# Altium PCB COREV1.1_pcb5_0.PcbDoc (part 13 of 14)
Units mil, origin at the board's own origin, x right, y up, seen from the top; angles counter-clockwise.
Board outline 2860 x 2420 mil, 6 copper layers (Top Layer, GND, SIGNAL_1, SIGNAL_2, POWER, Bottom Layer); 110 components, 241 nets, 882 pads, 697 vias.
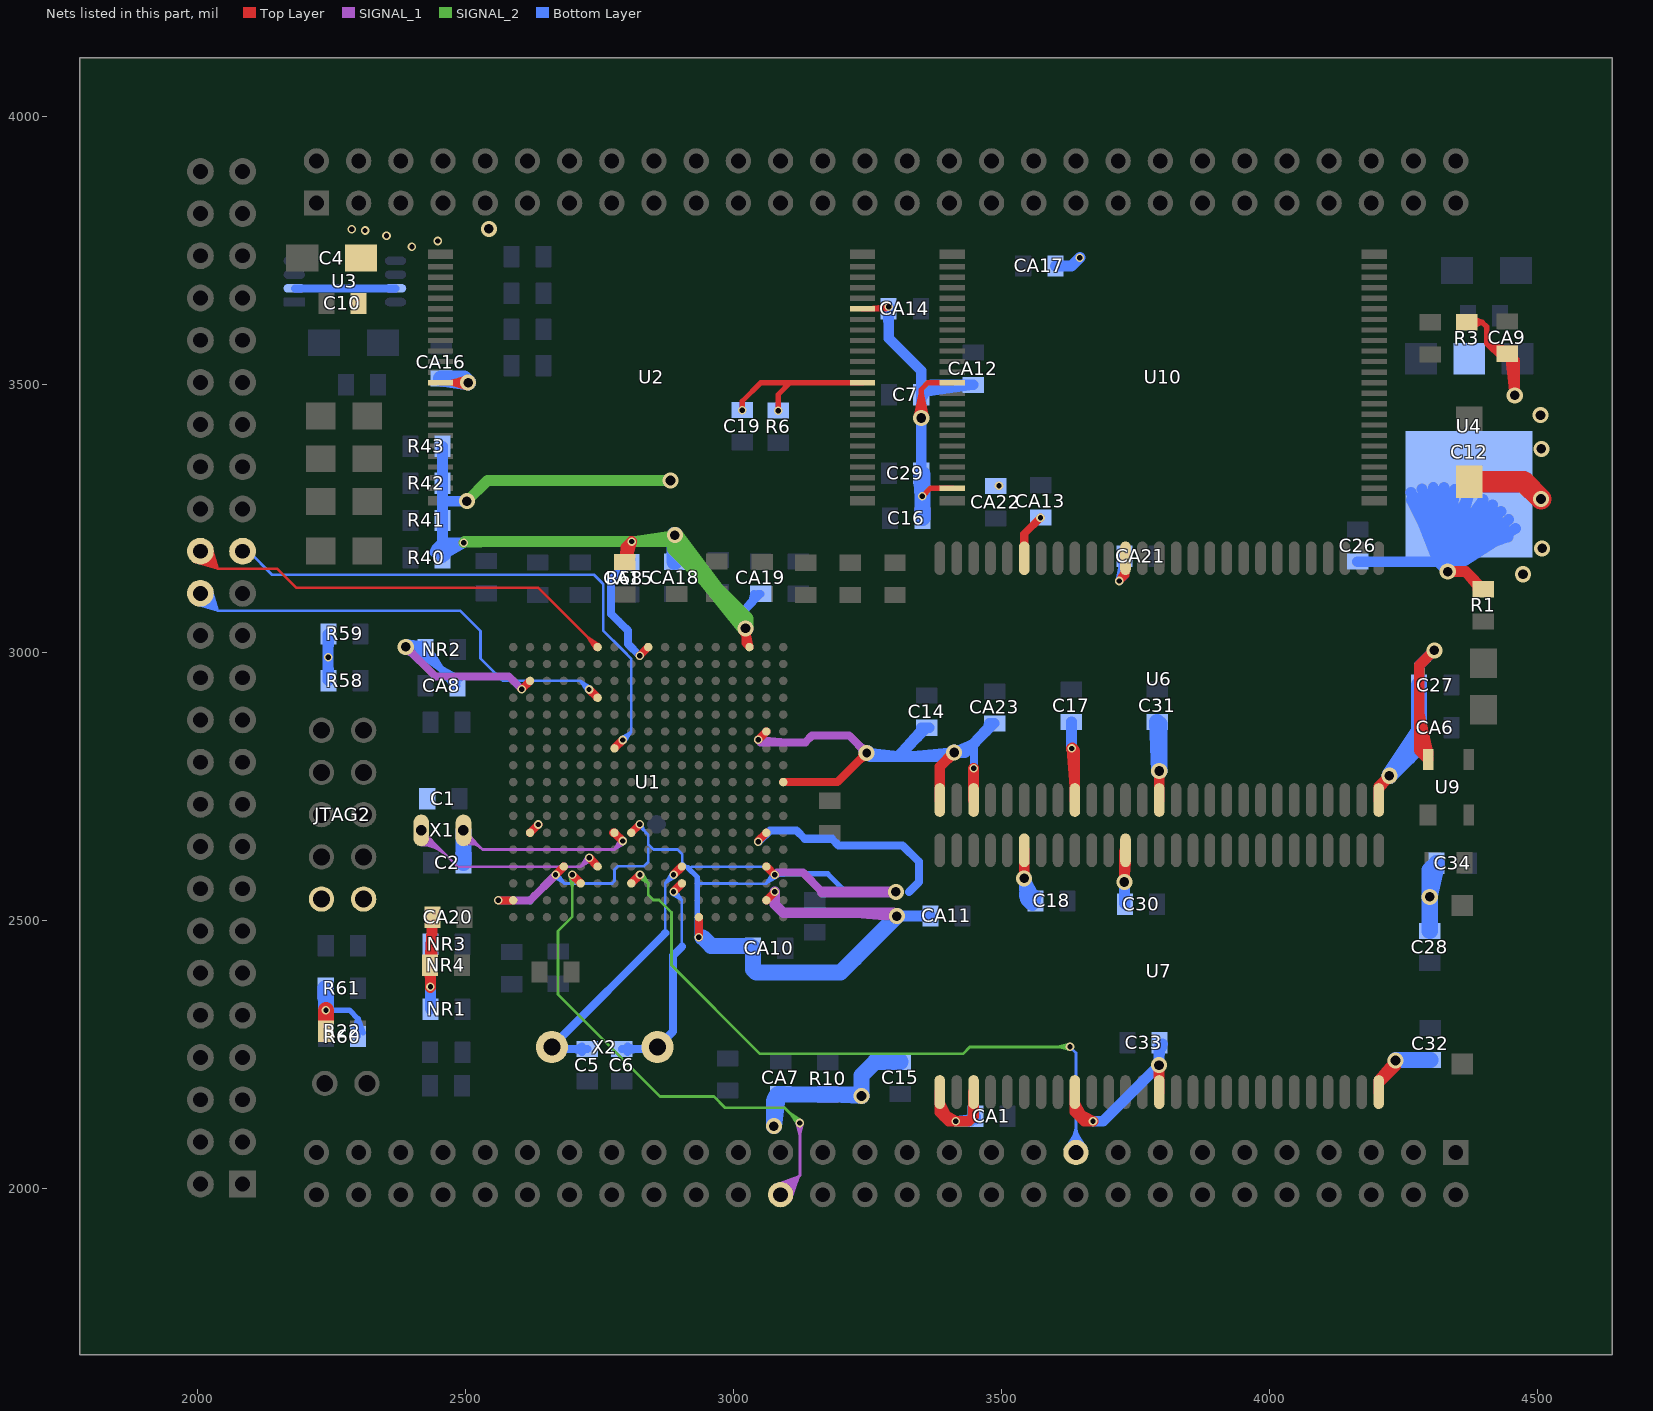
[diagram p17: the nets of this part, all layers, seen from the top]

## Via types
v1: diameter 16, hole 10, Top Layer to Bottom Layer, tented both sides, 638 vias
v2: diameter 30, hole 18, Top Layer to Bottom Layer, tented both sides, 56 vias
v3: diameter 16, hole 10, Top Layer to Bottom Layer, 2 vias
v4: diameter 30, hole 16, Top Layer to Bottom Layer, tented both sides, 1 vias

## Nets (pads, with @x,y where several pads share a name; then routed paths per layer and width w, separated by ;. In a path a pad name is that pad's centre, name@x,y a point inside that pad or via, vN(x,y) a via of type N, cw(c..) or ccw(c..) an arc to the next point about the centre after c; other vN are vias at no path point) (continued)
VDD33V: C4.1 C7.1 C10.1 C12.1 C14.1 C15.1 C16.1 C17.1 C18.1 C19.1 C26.1 C27.1 C28.1 C29.1 C30.1 C31.1 C32.1 C33.1 C34.1 CA1.1 CA6.1 CA7.1 CA8.1 CA9.1 CA10.1 CA11.1 CA12.1 CA13.1 CA14.1 CA15.1 CA16.1 CA17.1 CA18.1 CA19.1 CA20.1 CA21.1 CA22.1 CA23.1 JTAG2.1 JTAG2.2 NR1.1 NR2.1 NR3.1 NR4.1 R1.1 R3.1 R6.1 R10.1 R22.1 R40.2 R41.2 R42.2 R43.2 R58.1 R59.1 R60.1 R61.1 R68.1 U1.A9 U1.B6 U1.B12 U1.B14 U1.B16 U1.C1 U1.F17 U1.J1 U1.K12 U1.P14 U1.T3 U1.T12 U1.U16 U2.12 U2.19 U2.37 U3.2 U3.7 U4.3 U4.4 U6.1 U6.3 U6.9 U6.14 U6.27 U6.43 U6.49 U7.1 U7.3 U7.9 U7.14 U7.27 U7.43 U7.49 U9.4 U10.37 U10.47 | length 27313.2
  Top Layer w10: U2.37@2453.42,3503.52 v2(2505,3503.52) U2.37@2472.12,3503.52 ; v2@2497.93,3496.45 ccw(c2480.86,3479.38) 2480.86,3503.52 ccw(c2480.86,3527.67) v2@2497.93,3510.6 ; v2@2503.48,3493.64 U2.37@2472.12,3503.52 ; v2@2503.48,3513.41 U2.37@2472.12,3503.52 ; v1(3016.35,3452.39) 3016.35,3468.85 3051.02,3503.52 3105.52,3503.52 ; v1(3083.59,3451.5) 3083.59,3481.59 3105.52,3503.52 ; 3187.2,3503.52 U2.12@3222.13,3503.52 ; U2.12@3240.83,3503.52 3105.52,3503.52 ; U2.19@3240.83,3641.32 v1@3285.32,3641.32 ; U2.19@3250.14,3641.32 v1(3289.5,3645.5) ; 3272.16,3641.32 ccw(c3272.16,3662.84) v1@3287.38,3647.62 ; v2@3340.45,3438.72 3350.39,3482.61 ; v2@3343.32,3444.68 ccw(c3326.25,3461.75) 3350.39,3461.75 ccw(c3374.53,3461.75) v2@3357.46,3444.68 ; v2(3350.39,3437.61) 3350.39,3482.61 ; v2@3350.5,3443 3350.39,3443.11 3350.39,3490.89 3363.02,3503.52 ; v1(3352.39,3291.5) 3367.56,3306.67 ; v2@3360.33,3438.72 3350.39,3482.61 ; U10.47@3389.72,3306.67 3367.56,3306.67 ; U10.37@3389.72,3503.52 3363.02,3503.52 ; U10.47@3408.42,3306.67 3367.56,3306.67 ; U10.37@3408.42,3503.52 3363.02,3503.52 ; R3.1@4368.27,3616.27 4397.23,3616.27 ; R3.1@4373.27,3616.27 4397.23,3616.27 ; R3.1@4375.36,3606.49 4397.23,3616.27 ; R3.1@4375.36,3626.05 4397.23,3616.27 ; R3.1@4380.38,3609.24 cw(c4397.23,3592.57) 4397.23,3616.27 ; R3.1@4380.38,3623.3 ccw(c4397.23,3639.97) 4397.23,3616.27 ; 4412.73,3569.77 ccw(c4425.95,3582.99) CA9.1@4434.68,3566.46 ; 4422.32,3560.18 ccw(c4432.57,3570.44) 4439.35,3557.61 4405.5,3577 ; CA9.1@4433.3,3549.64 4405.5,3577 ; CA9.1@4443.16,3566.85 4405.5,3577 ; CA9.1@4444.35,3557.61 4424.89,3557.61 4405.5,3577 ; v1@3285.32,3641.32 v1(3289.5,3645.5) ; v1@3285.32,3641.32 3259.53,3641.32 v1(3289.5,3645.5) ; 4397.23,3616.27 4405.5,3608 4405.5,3577
  Top Layer w15: v2@3017.2,3039.7 cw(c3004.39,3026.89) 3022.5,3026.89 cw(c3040.61,3026.89) v2@3027.8,3039.7 ; 3022.5,3028.78 ccw(c3048.54,3028.78) U1.C1@3030.13,3010.37 ; U1.C1@3030,3010.24 U1.C1@3029.86,3010.1 ; v1(3046,2647) 3046,2648.29 U1.B12@3061.36,2663.65 ; U1.A9@3092.85,2758.13 3194.13,2758.13 v4(3248.5,2812.5) 3201.68,2765.68 ; v4@3241,2812.5 cw(c3222.89,2812.5) 3235.7,2799.7 cw(c3248.5,2786.89) v4@3248.5,2805 ; U6.49@3542.61,3175.91 3542.61,3221.56 ; U6.49@3542.61,3197.57 3542.61,3221.56 ; v1@3724.59,3138.09 ccw(c3712.38,3150.3) U6.43@3729.29,3153.79 ; U6.43@3731.58,3154.26 v1(3720,3133.5) 3731.58,3145.08 U6.43@3731.58,3175.91 ; v1(2825,2994) v1@2825,2994.22 ; v1(2825,2994) U1.J1@2840.89,3010.1 ; v1(2825,2994) U1.J1@2840.89,3010.1 ; v1@2825,2994.22 U1.J1@2840.89,3010.1 ; v1@2825,2994.22 U1.J1@2840.89,3010.1 ; 3022.5,3017.46 v2(3022.5,3045) ; 3022.5,3017.46 U1.C1@3029.86,3010.1 ; 3022.5,3017.46 v2(3022.5,3045) ; v2(3022.5,3045) U1.C1@3029.86,3010.1 ; v1(3046,2837) v1@3046,2837.26 ; v1(3046,2837) U1.B6@3061.36,2852.62 ; v1(3046,2837) U1.B6@3061.36,2852.62 ; v1@3046,2837.26 U1.B6@3061.36,2852.62 ; v1@3046,2837.26 U1.B6@3061.36,2852.62 ; 3542.61,3221.56 3572.54,3251.5 v1(3573,3251.5) 3542.61,3221.56 ; v1(2561.12,2537.66) U1.U16@2588.92,2537.66 v1(2561.12,2537.66) ; v1(2604.8,2931.5) U1.T3@2620.41,2947.11 v1(2604.8,2931.5) ; U1.T12@2620.41,2663.65 v1(2635.77,2679) U1.T12@2620.41,2663.65 ; v1(2668,2585) 2683.41,2600.41 U1.P14@2683.41,2600.65 v1(2668,2585) ; U1.K12@2809.39,2663.65 v1(2825,2679.26) U1.K12@2809.39,2663.65 ; v1(2935.37,2468.37) U1.F17@2935.37,2506.16 v1(2935.37,2468.37) ; U1.B16@3061.36,2537.66 v1(3077,2553.3) U1.B16@3061.36,2537.66 ; U1.B14@3061.36,2600.65 v1(3077,2585.01) U1.B14@3061.36,2600.65
  Top Layer w20: NR4.1@2429.96,2424.95 ccw(c2410.28,2444.62) 2438.11,2444.62 ; NR4.1@2433.5,2416.41 NR4.1@2434.61,2417.53 ; v1@2434,2376.5 2434,2374.5 2434.61,2375.11 v1@2434.61,2376.5 ; NR4.1@2438.11,2425.65 CA20.1@2438.11,2500.65 ; CA20.1@2438.11,2496.82 2433.5,2421.41 CA20.1@2438.11,2496.97 ; CA20.1@2438.11,2505.65 2438.11,2421.03 NR4.1@2434.61,2417.53 ; R68.1@2793.94,3172.16 ccw(c2781.56,3184.53) 2799.06,3184.53 ; U7.1@3384.97,2158.1 ccw(c3414.28,2154.48) 3393.4,2133.6 ; U7.1@3385.13,2179.73 3385.13,2141.87 ; U6.1@3385.13,2724.73 3385.13,2786.92 ; U6.1@3385.13,2746.39 3385.13,2786.92 ; U7.3@3448.12,2158.08 3448.12,2134.62 ; U7.3@3448.12,2179.73 3448.12,2134.62 ; v1@3632.41,2822.41 cw(c3621.11,2811.11) 3637.1,2811.11 ; U7.9@3636.94,2158.08 ccw(c3671.02,2157.19) 3646.91,2133.09 ; U7.9@3637.1,2179.73 3637.1,2142.9 ; U6.9@3637.1,2724.73 3637.1,2814.9 ; U6.9@3637.1,2746.39 3637.1,2814.9 ; U6.9@3637.1,2749 v1(3631,2821) ; U6.9@3637.1,2749.14 v1(3631,2821) ; U7.43@3731.58,2609.26 v2(3729.5,2571.86) 3729.5,2628.83 U7.43@3731.58,2630.91 ; U7.27@4204.02,2179.73 U7.27@4204.02,2196.65 ; U6.27@4204.02,2724.73 4204.02,2750.02 v2(4224,2770) U6.27@4204.02,2746.39 ; 4219.46,2212.09 ccw(c4192.77,2238.79) v2@4230.52,2238.79 ; 4279.61,2850.15 ccw(c4335.78,2850.15) U9.4@4296.06,2810.44 ; 4279.61,2885.27 U9.4@4296.17,2810.55 ; U9.4@4296.17,2800.71 4279.61,2817.27 ; v2(4333,3151) 4366.41,3151 ; 4382.34,3135.08 cw(c4365.27,3118) R1.1@4389.41,3118 ; R1.1@4394.41,3118 4366.41,3151 ; R1.1@4399.41,3118 4366.41,3151 ; CA9.1@4444.35,3557.61 4458,3543.96 v2(4458,3480) CA9.1@4449.35,3557.61 ; CA9.1@4445.81,3554.08 cw(c4416.38,3524.65) 4458,3524.65 ; v1@2434.61,2376.5 NR4.1@2434.61,2416.41 ; v1@2434.61,2376.5 2433.5,2411.41 v1(2434.5,2376.5) NR4.1@2434.61,2416.41 ; NR4.1@2434.61,2416.41 NR4.1@2434.61,2417.53 ; 2799.06,3196.17 2799.06,3169.12 v1(2809.95,3207.05) ; 2799.06,3196.17 v1(2809.95,3207.05) ; 2799.06,3196.17 R68.1@2797.47,3168.62 v1(2809.95,3207.05) ; 3385.13,2141.87 3401.5,2125.5 ; 3385.13,2141.87 U7.1@3385.13,2158.08 ; 3385.13,2141.87 U7.1@3385.13,2158.08 ; 3385.13,2141.87 v1(3415,2125.5) ; U7.1@3385.13,2158.08 3401.5,2125.5 ; 3385.13,2786.92 v2(3411.7,2813.5) 3385.13,2786.92 ; 3401.5,2125.5 v1(3415,2125.5) ; 3401.5,2125.5 v1(3415,2125.5) ; 3401.5,2125.5 v1(3415,2125.5) ; v1(3415,2125.5) 3439,2125.5 3448.12,2134.62 ; v2(3542.5,2578.5) v2@3542.61,2578.61 ; v2(3542.5,2578.5) 3542.61,2609.26 v2@3542.61,2578.61 ; v2(3542.5,2578.5) U7.49@3542.61,2630.91 v2@3542.61,2578.61 ; v1(3631,2821) 3637.1,2814.9 ; 3637.1,2142.9 3654.5,2125.5 ; 3637.1,2142.9 U7.9@3637.1,2158.08 ; 3637.1,2142.9 U7.9@3637.1,2158.08 ; 3637.1,2142.9 v1(3671,2125.5) ; U7.9@3637.1,2158.08 3654.5,2125.5 ; 3654.5,2125.5 v1(3671,2125.5) ; 3654.5,2125.5 v1(3671,2125.5) ; 3654.5,2125.5 v1(3671,2125.5) ; v2(3794,2230) v2@3794.58,2229.42 ; v2(3794,2230) U7.14@3794.58,2179.73 v2@3794.58,2229.42 ; v2(3794,2230) 3794.58,2201.39 v2@3794.58,2229.42 ; v2(3794.5,2779) v2@3794.58,2778.92 ; v2(3794.5,2779) 3794.58,2746.39 v2@3794.58,2778.92 ; v2(3794.5,2779) U6.14@3794.58,2724.73 v2@3794.58,2778.92 ; U7.27@4204.02,2196.65 v2@4235.52,2228.15 ; U7.27@4204.02,2196.65 v2(4235.52,2238.79) ; v2@4235.52,2228.15 v2(4235.52,2238.79) ; v2@4235.52,2228.15 4204.02,2201.39 v2(4235.52,2238.79) ; 4279.61,2817.27 4279.61,2975.61 ; 4279.61,2817.27 U9.4@4296.17,2810.55 ; 4279.61,2817.27 U9.4@4296.17,2810.55 ; 4279.61,2975.61 v2(4308,3004) 4279.61,2975.61 ; U6.3@3448.12,2724.73 3448.12,2783.41 3448.12,2746.39 v1(3448.5,2783.79) U6.3@3448.12,2724.73
  Top Layer w30: R22.1@2239.5,2293.41 v1(2239.5,2332.5) R22.1@2239.5,2298.41
  Top Layer w40: C12.1@4373.17,3318.8 4474.7,3318.8 v2(4507,3286.5)
  SIGNAL_1 w10: v1(3046,2837) v1@3048,2835
  SIGNAL_1 w15: v2@2388.5,3003 cw(c2388.5,2984.89) 2401.3,2997.7 cw(c2414.11,3010.5) v2@2396,3010.5 ; v2(2388.5,3010.5) 2443.35,2955.65 2580.65,2955.65 ; v1(2561.12,2537.66) 2620.66,2537.66 v1(2668,2585) 2628.18,2545.18 ; v1@3046.35,2837.35 ccw(c3058.07,2849.07) 3058.07,2832.5 ; v1@3077.35,2584.66 cw(c3089.04,2572.97) 3089.04,2589.5 ; v1@3081.49,2589.5 3129.5,2589.5 3165.7,2553.3 ; 3100.88,2832.5 v1(3046,2837) 3050.5,2832.5 3134,2832.5 3146.5,2845 3216,2845 ; v4@3241,2812.5 ccw(c3222.89,2812.5) 3235.7,2825.3 ccw(c3248.5,2838.11) v4@3248.5,2820 ; 2580.65,2955.65 v1(2604.8,2931.5) 2580.65,2955.65 ; 3216,2845 v4(3248.5,2812.5) 3216,2845
  SIGNAL_1 w20: v1(3077,2553.3) 3077,2530.5 3093,2514.5 3298.5,2514.5 v2(3305,2508) 3228.07,2514.5 ; 3165.7,2553.3 v2(3303,2553.3) 3228,2553.3 ; 3277.24,2514.5 cw(c3277.24,2480.24) v2@3301.46,2504.46
  SIGNAL_2 w20: v2(2502.5,3282.5) 2541,3321 v2(2882.5,3321) ; 2564.83,3207.05 v1(2496.5,3205) 2498.55,3207.05 v1(2809.95,3207.05) ; 2849.58,3207.05 ccw(c2849.58,3259.92) v2@2886.96,3222.54 ; 2878.55,3207.05 v1(2809.95,3207.05) ; v2(2890.5,3219) v1(2809.95,3207.05)
  SIGNAL_2 w30: 2907.82,3177.18 cw(c2949.65,3219) v2(2890.5,3219) ; 2949.33,3135.67 v2(3022.5,3045) ; 2965.33,3119.67 v2(2890.5,3219) ; 3010.13,3074.87 cw(c2980.25,3045) v2(3022.5,3045) ; 2890.5,3194.5 3022.5,3062.5 ; 2890.5,3194.5 v2(2890.5,3219) ; 2890.5,3194.5 v2(2890.5,3219) ; 2890.5,3194.5 v2(2890.5,3219) ; v2(3022.5,3045) 3022.5,3062.5 ; v2(3022.5,3045) 3022.5,3062.5
  Bottom Layer w5: v1@2664.61,2580.67 2684,2569 ; v1@2668,2579.5 cw(c2668,2566.22) 2677.39,2575.61 cw(c2686.78,2585) v1@2673.5,2585 ; v1(2668,2585) 2684,2569 ; v1@2672.33,2588.39 2684,2569 ; v1(2825,2679.26) 2825,2675.44 2841.24,2659.2 2841.24,2641.84 2850.81,2632.27 2895.15,2632.27 2904.5,2622.92 2904.5,2608 2914.81,2597.69 ; v1@2825.5,2679.26 ccw(c2835.91,2679.26) 2828.55,2671.9 ; v1@2830.5,2679.26 ccw(c2852.98,2679.26) 2837.08,2663.36 ; 2841,2634 2841,2609.5 2832.5,2601 2784,2601 2778,2595 2778,2573.5 2773.5,2569 2684,2569 ; 2915.15,2598.03 2917.62,2600.5 ; 2922.53,2600.5 3061.51,2600.5 ; 2932.5,2569.03 3007.05,2569.03 ; 3007.58,2568.5 3060.49,2568.5 ; v1@3072.65,2581.64 3061.51,2600.5 ; v1@3072.68,2588.42 3060.49,2568.5 ; v1@3077,2579.51 ccw(c3077,2566.23) 3067.61,2575.62 ccw(c3058.22,2585.01) 3071.5,2585.01 ccw(c3058.22,2585.01) 3067.61,2594.4 ccw(c3077,2603.79) v1@3077,2590.51 ; v1@3080.37,2589.36 3061.51,2600.5 ; v1@3080.4,2580.69 3060.49,2568.5 ; 3060.49,2568.5 v1(3077,2585.01) ; 3060.49,2568.5 v1(3077,2585.01) ; 3061.51,2600.5 v1(3077,2585.01) ; 3061.51,2600.5 v1(3077,2585.01)
  Bottom Layer w10: v1(2239.5,2332.5) 2283.5,2332.5 2299.5,2316.5 ; R60.1@2289.66,2290.19 2299.5,2316.5 ; R60.1@2292.43,2295.48 ccw(c2275.36,2312.55) 2299.5,2312.55 ccw(c2323.65,2312.55) R60.1@2306.58,2295.48 ; R60.1@2299.5,2283.41 2299.5,2316.5 ; R60.1@2299.5,2288.41 2299.5,2316.5 ; R60.1@2309.34,2290.19 2299.5,2316.5 ; v2@2385.87,3000.85 NR2.1@2422.86,2995.94 ; v2@2388.52,3000.5 NR2.1@2425.5,3005.59 ; v2@2388.48,3020.5 NR2.1@2425.47,3015.59 ; v2@2390.12,3000.63 NR2.1@2419.27,3010.5 ; v2@2390.12,3020.37 NR2.1@2419.27,3010.5 ; v2@2391.13,3020.15 NR2.1@2425.5,3005.59 ; v2@2391.18,3000.87 NR2.1@2425.47,3015.59 ; v2@2393.6,3019.1 NR2.1@2422.86,2995.94 ; v2@2395.57,3003.43 cw(c2412.64,2986.36) 2412.64,3010.5 cw(c2412.64,3034.64) v2@2395.57,3017.57 ; v2@2401.14,3010.5 ccw(c2401.14,3034.95) NR2.1@2418.43,3017.66 ; v2@2401.57,3010.5 cw(c2401.57,2986.67) NR2.1@2418.43,3003.52 ; NR2.1@2418.84,2993.12 2459.07,2963.97 ; NR2.1@2424.84,3004.93 NR2.1@2419.27,3010.5 ; NR2.1@2425.5,2990.59 cw(c2425.5,2973.8) NR2.1@2437.37,2985.67 ; NR2.1@2425.5,3000.59 2459.07,2963.97 ; NR2.1@2433.51,3006.57 2459.07,2963.97 ; NR2.1@2435.5,3000.59 ccw(c2466.99,3000.59) 2444.72,2978.32 ; 2459.78,2963.26 ccw(c2485.39,2988.87) CA8.1@2485.39,2952.65 ; CA8.1@2471.85,2951.19 cw(c2463.32,2942.65) CA8.1@2475.39,2942.65 ; CA8.1@2478.1,2935.8 2449.17,2973.87 ; CA8.1@2485.39,2937.65 2425.5,2997.55 NR2.1@2425.5,3005.59 ; CA8.1@2485.39,2942.65 2449.17,2973.87 ; CA8.1@2491.09,2950.87 2449.17,2973.87 ; 2915.15,2598.03 2932.37,2580.8 v1@2932.37,2473.53 ; 2932.37,2482.86 ccw(c2949.86,2482.86) v1@2937.5,2470.5 ; 2932.37,2507.51 v1(2935.37,2468.37) ; v1@3079.12,2582.89 cw(c3089.04,2572.97) 3089.04,2587 ; 3115.27,2587 v1(3077,2585.01) 3078.99,2587 3176,2587 3209.5,2553.5 3277,2553.5 ; v2(2388.5,3010.5) NR2.1@2419.27,3010.5 ; v2(2388.5,3010.5) NR2.1@2422.86,2995.94 ; v2(2388.5,3010.5) NR2.1@2425.47,3015.59 ; v2(2388.5,3010.5) NR2.1@2425.5,3005.59
  Bottom Layer w15: U3.2@2181.82,3679.65 U3.7@2369.3,3679.65 ; U3.2@2192.33,3679.65 2245.4,3679.65 ; 2304.22,3679.65 U3.7@2357.29,3679.65 ; v2@2504.18,3502.71 v2(2505,3503.52) ; 2783.01,3147.05 ccw(c2761.67,3168.39) CA15.1@2791.85,3168.39 ; 2786,3058 2792.25,3051.75 ; CA15.1@2799.04,3173.69 ccw(c2786.24,3186.49) 2804.35,3186.49 ccw(c2822.45,3186.49) CA15.1@2809.65,3173.69 ; CA15.1@2799.35,3168.39 2771.85,3135.89 ; 2804.35,3192.32 cw(c2824.68,3192.32) v1@2810.3,3206.7 ; v2@3017.2,3050.3 ccw(c3004.39,3063.11) 3022.5,3063.11 ccw(c3040.61,3063.11) v2@3027.8,3050.3 ; v2(3022.5,3045) 3022.5,3081.46 ; 3029.32,3088.27 ccw(c3007.98,3109.61) CA19.1@3038.15,3109.61 ; CA19.1@3045.65,3109.61 3022.5,3081.46 ; v1(3046,2647) 3068.22,2668 ; v1@3047.22,2647 3068.22,2668 ; CA19.1@3050.65,3109.61 3022.5,3081.46 ; 3327.3,2553.3 3346,2572 3346,2609.71 3315.71,2640 3196,2640 3183.5,2652.5 3132.99,2652.5 3117.49,2668 3068.22,2668 ; C29.1@3350.39,3334.65 C29.1@3352.39,3332.65 ; v1(3448.5,2783.79) 3448.5,2829.73 ; v1@3719.65,3133.85 ccw(c3695.59,3157.91) 3729.61,3157.91 ; CA21.1@3724.31,3169.04 cw(c3711.51,3156.24) 3729.61,3156.24 cw(c3747.72,3156.24) CA21.1@3734.92,3169.04 ; 2771.85,3135.89 2771.85,3072.15 2792.25,3051.75 ; 2771.85,3135.89 CA15.1@2804.35,3168.39 ; 2792.25,3051.75 2803.02,3040.98 2803.02,3015.98 ; 2803.02,3015.98 v1(2825,2994) 2803.02,3015.98 ; CA15.1@2804.35,3168.39 2804.35,3201.45 v1(2809.95,3207.05) CA15.1@2804.35,3168.39 ; v1(3720,3133.5) 3720,3134 3729.61,3143.61 ; v1(3720,3133.5) CA21.1@3729.61,3179.35 3729.61,3143.61 ; v1(3720,3133.5) 3729.61,3174.35 3729.61,3143.61
  Bottom Layer w20: R58.1@2244.19,2947.59 2243.5,2948.28 v1(2243.5,2991) ; R58.1@2244.19,2952.59 v1(2243.5,2991) ; R59.1@2244.19,3029.59 v1(2243.5,2991) ; NR1.1@2434.5,2334.59 v1(2434.5,2376.5) ; NR1.1@2434.5,2339.59 v1(2434.5,2376.5) ; NR3.1@2434.5,2450.59 v1(2434.5,2376.5) ; NR3.1@2434.5,2455.59 v1(2434.5,2376.5) ; R40.2@2442.9,3187.08 cw(c2468.23,3178.14) 2468.23,3205 ; R40.2@2457.05,3177.09 2457.05,3208 ; R41.2@2457.05,3241.42 2457.05,3208 ; R41.2@2457.05,3251.42 2457.05,3282.5 ; R42.2@2457.05,3310.76 2457.05,3282.5 ; R40.2@2461.76,3180.43 cw(c2496.5,3168.17) v1(2496.5,3205) ; v2(2502.5,3282.5) 2457.05,3282.5 ; CA7.1@3088.41,2176.5 3089.91,2175 CA7.1@3092.91,2172 ; R10.1@3165,2172 R10.1@3175.91,2172 ; v4@3252.04,2816.04 ccw(c3276.26,2840.26) 3276.26,2806 ; CA14.1@3289.61,3636.85 3289.61,3586.49 ; CA14.1@3289.61,3641.85 3289.61,3586.49 ; 3334.33,2806 v2(3411.7,2813.5) ; 3343.58,2842.54 ccw(c3326.51,2859.61) C14.1@3350.65,2859.61 ; C29.1@3350.39,3334.65 v2(3350.39,3437.61) ; C29.1@3350.39,3339.65 3350.39,3414.65 ; C7.1@3350.39,3475.65 v2(3350.39,3437.61) ; C7.1@3353.02,3478.02 C7.1@3350.39,3475.39 ; C7.1@3353.92,3482.12 cw(c3396.16,3439.89) 3396.16,3499.61 ; C14.1@3355.65,2859.61 3307.04,2806 ; C14.1@3360.65,2859.14 C14.1@3360.65,2859.61 ; C14.1@3365.59,2859.61 C14.1@3360.65,2859.61 ; 3381.53,2806 ccw(c3381.53,2843.68) v2@3408.17,2817.04 ; v2@3404.2,2806 3307.04,2806 ; v2@3412.58,2818.42 ccw(c3419.69,2858.55) 3448.5,2829.73 ; 3430.26,2125.5 ccw(c3430.26,2150.7) CA1.1@3448.08,2132.88 ; CA12.1@3445.86,3499.61 C7.1@3350.39,3485.65 ; CA12.1@3447.65,3499.61 3369.35,3499.61 ; CA1.1@3451.61,2129.35 v1(3415,2125.5) 3442.77,2125.5 CA1.1@3451.61,2134.35 ; 3470.93,2852.17 ccw(c3455.64,2867.46) CA23.1@3477.27,2867.46 ; CA23.1@3482.27,2867.46 3448.5,2829.73 ; CA23.1@3486.61,2867.85 3448.5,2829.73 ; 3542.5,2550.04 ccw(c3566.74,2550.04) C18.1@3558.53,2527.23 ; 3546.54,2553.42 ccw(c3563.61,2570.49) C18.1@3563.61,2546.35 ; v2@3547.13,2576.6 ccw(c3572.44,2566.21) C18.1@3553.09,2546.87 ; C18.1@3565.31,2546.05 cw(c3576.99,2578.5) v2(3542.5,2578.5) ; CA17.1@3600.78,3721.31 3630.81,3721.31 v1(3646.5,3737) ; v1(3671,2125.5) 3689.5,2125.5 v2(3794,2230) ; v2@3729.35,2571.7 v2(3729.5,2571.86) ; C30.1@3730.61,2530.35 3729.5,2531.46 v2(3729.5,2571.86) ; C30.1@3730.61,2535.35 v2(3729.5,2571.86) ; 3736.57,2172.57 v2(3794,2230) ; C31.1@3790.65,2870.61 C31.1@3794.5,2866.77 ; 3794,2251.23 cw(c3810.81,2251.23) C33.1@3798.92,2263.12 ; C33.1@3795.39,2266.65 v2(3794,2230) ; C33.1@3800.65,2269.61 3799.04,2268 3794,2262.96 v2(3794,2230) ; C26.1@4164.65,3169.61 4314.39,3169.61 ; C26.1@4169.65,3169.61 4244.65,3169.61 ; U4.4@4265.02,3284.53 v2(4333,3151) ; C27.1@4279.61,2939.35 4279.61,2975.61 ; C27.1@4279.61,2944.35 4279.61,2975.61 ; U4.4@4284.51,3292.78 v2(4333,3151) ; U4.4@4304.51,3298.11 v2(4333,3151) ; U4.4@4324.73,3300.61 v2(4333,3151) ; U4.4@4344.89,3300.37 v2(4333,3151) ; U4.4@4398.87,3285.59 v2(4333,3151) ; U4.4@4416.33,3275.53 v2(4333,3151) ; U4.4@4432.46,3263.07 v2(4333,3151) ; U4.4@4446.96,3248.29 v2(4333,3151) ; U4.4@4459.52,3231.27 v2(4333,3151) ; v1(2243.5,2991) R59.1@2243.5,3023.5 ; R59.1@2243.5,3023.5 2243.5,3033.9 R59.1@2244.19,3034.59 2244.19,3024.19 R59.1@2243.5,3023.5 ; R40.2@2457.05,3182.09 2457.05,3208 ; R40.2@2457.05,3182.09 2460.05,3205 ; R40.2@2457.05,3182.09 2457.05,3208 ; R40.2@2457.05,3182.09 v1(2496.5,3205) ; R40.2@2457.05,3182.09 2460.05,3205 ; 2457.05,3208 R41.2@2457.05,3246.42 2457.05,3282.5 ; 2457.05,3208 2460.05,3205 ; 2457.05,3282.5 R42.2@2457.05,3315.76 ; R42.2@2457.05,3315.76 R43.2@2457.05,3385.09 2457.05,3320.76 2457.05,3380.09 R42.2@2457.05,3315.76 ; 2460.05,3205 v1(2496.5,3205) ; 3289.61,3586.49 3350.39,3525.71 ; 3289.61,3586.49 v1(3289.5,3645.5) 3289.61,3586.49 ; 3307.04,2806 3255,2806 v4(3248.5,2812.5) 3307.04,2806 ; 3307.04,2806 C14.1@3360.65,2859.61 ; v2(3350.39,3437.61) C7.1@3350.39,3475.39 ; C7.1@3350.39,3475.39 C7.1@3350.39,3480.65 ; C7.1@3350.39,3480.65 3369.35,3499.61 ; C7.1@3350.39,3480.65 3350.39,3525.71 ; C7.1@3350.39,3485.65 3442.65,3499.61 3369.35,3499.61 ; C7.1@3350.39,3485.65 3350.39,3525.71 ; v2(3411.7,2813.5) 3432.27,2813.5 ; v2(3411.7,2813.5) 3448.5,2829.73 ; v2(3411.7,2813.5) 3432.27,2813.5 ; 3432.27,2813.5 3448.5,2829.73 ; 3542.5,2557.46 v2(3542.5,2578.5) ; 3542.5,2557.46 C18.1@3563.61,2536.35 v2(3542.5,2578.5) ; 3542.5,2557.46 C18.1@3563.61,2541.35 ; 3542.5,2557.46 C18.1@3563.61,2541.35 ; 3542.5,2557.46 v2(3542.5,2578.5) ; 3542.5,2557.46 v2(3542.5,2578.5) ; 3542.5,2557.46 v2(3542.5,2578.5) ; v2(3542.5,2578.5) C18.1@3563.61,2541.35 ; v2(3542.5,2578.5) C18.1@3563.61,2541.35 ; v2(3542.5,2578.5) C18.1@3563.61,2541.35 ; v1@3630.65,2821.35 v1(3631,2821) ; v1@3630.65,2821.35 C17.1@3630.65,2870.61 ; v1@3630.65,2821.35 C17.1@3630.65,2870.61 ; C17.1@3630.65,2870.61 v1(3631,2821) ; C17.1@3630.65,2870.61 v1(3631,2821) ; 4279.61,2975.61 v2(4308,3004) 4279.61,2975.61 ; 4314.39,3169.61 v2(4333,3151) ; 4314.39,3169.61 4445.28,3215.51 4314.39,3169.61 ; 4314.39,3169.61 4264.52,3299.04 4314.39,3169.61 ; 4314.39,3169.61 4436.67,3235.07 4314.39,3169.61 ; 4314.39,3169.61 4284.99,3305.16 4314.39,3169.61 ; 4314.39,3169.61 4425.49,3252.64 4314.39,3169.61 ; 4314.39,3169.61 4305.62,3308.04 4314.39,3169.61 ; 4314.39,3169.61 4412.08,3268.07 4314.39,3169.61 ; 4314.39,3169.61 4326.06,3307.82 4314.39,3169.61 ; 4314.39,3169.61 4396.76,3281.2 4314.39,3169.61 ; 4314.39,3169.61 4345.99,3304.67 4314.39,3169.61 ; 4314.39,3169.61 U4.4@4372.57,3295.52 ; 4314.39,3169.61 U4.4@4372.57,3295.52 ; 4314.39,3169.61 v2(4333,3151) ; 4314.39,3169.61 v2(4333,3151) ; v2(4333,3151) U4.4@4372.57,3295.52 ; v2(4333,3151) 4401.9,3200.3 v2(4333,3151) ; v2(3305,2508) 3305.35,2508.35 CA11.1@3367.61,2508.35 v2(3305,2508)
  Bottom Layer w30: R61.1@2239.19,2368.59 v1(2239.5,2332.5) 2239.5,2373.28 R61.1@2239.19,2373.59 ; 2485.47,3511.61 cw(c2485.47,3484) v2(2505,3503.52) ; v2@2890.35,3218.85 CA18.1@2890.35,3169.39 v2(2890.5,3219) ; v1@2942.37,2468.53 2958.41,2452.5 3031.96,2452.5 CA10.1@3036.61,2447.85 3036.61,2408.39 ; CA10.1@3036.61,2442.85 3036.61,2408.39 ; 3075.5,2157.41 cw(c3102.5,2157.41) 3083.41,2176.5 v2(3075.5,2116.18) 3075.5,2163.59 CA7.1@3088.41,2176.5 ; 3226.36,2429.36 v2(3305,2508) 3199.5,2402.5 3042.5,2402.5 3036.61,2408.39 ; C15.1@3306.35,2236.39 3264.39,2236.39 ; C15.1@3311.35,2236.39 3264.39,2236.39 ; C29.1@3350.39,3329.65 v1(3352.39,3291.5) ; C16.1@3352.39,3250.65 v1(3352.39,3291.5) ; C16.1@3352.39,3255.65 v1(3352.39,3291.5) ; C29.1@3352.39,3332.65 v1(3352.39,3291.5) ; C31.1@3794.5,2866.77 v2(3794.5,2779) ; 4259.29,2805.29 ccw(c4210.24,2854.35) CA6.1@4279.61,2854.35 ; C28.1@4299.35,2480.39 v2(4299.35,2544) ; 4299.35,2571.11 cw(c4342.95,2571.11) 4312.12,2601.94 v2(4299.35,2544) ; C34.1@4312.12,2606.94 4299.35,2594.17 v2(4299.35,2544) ; v2@2496.91,3511.61 v2(2505,3503.52) ; v2@2496.91,3511.61 CA16.1@2454.65,3511.61 v2(2505,3503.52) ; v2@2496.91,3511.61 2459.65,3511.61 v2(2505,3503.52) ; R10.1@3175.91,2175 3089.91,2175 3170.91,2175 3093.41,2176.5 R10.1@3175.91,2175 ; R10.1@3175.91,2175 3200.5,2175 ; R10.1@3180.91,2175 3200.5,2175 ; R10.1@3180.91,2175 3216.5,2175 ; R10.1@3180.91,2175 3200.5,2175 ; R10.1@3180.91,2175 v2@3236.5,2175 ; R10.1@3180.91,2175 3200.5,2175 ; R10.1@3180.91,2175 v2(3239,2172.5) ; R10.1@3180.91,2175 v2(3239,2172.5) ; 3200.5,2175 v2@3236.5,2175 ; 3200.5,2175 3216.5,2175 ; 3200.5,2175 v2(3239,2172.5) ; 3200.5,2175 v2(3239,2172.5) ; 3216.5,2175 v2(3239,2172.5) ; 3216.5,2175 v2(3239,2172.5) ; v2@3236.5,2175 v2(3239,2172.5) ; v2(3239,2172.5) 3239,2211 3264.39,2236.39 ; v2(3794.5,2779) C31.1@3790.65,2870.61 v2(3794.5,2779) ; v2(4235.52,2238.79) v2@4236.34,2239.61 ; v2(4235.52,2238.79) C32.1@4300.65,2239.61 v2@4236.34,2239.61 ; v2(4235.52,2238.79) 4295.65,2239.61 v2@4236.34,2239.61 ; 4279.61,2825.61 v2(4224,2770) CA6.1@4279.61,2854.35 ; 4279.61,2825.61 CA6.1@4279.61,2859.35 ; 4279.61,2825.61 CA6.1@4279.61,2854.35 ; 4279.61,2825.61 CA6.1@4279.61,2854.35 ; CA6.1@4279.61,2859.35 C27.1@4279.61,2939.35 4279.61,2864.35 4279.61,2934.35 CA6.1@4279.61,2859.35
  other v1: 3495.5,3311 2400,3757.5 2448,3768 2352.5,3777.5 2312.5,3787.5 2287.5,3790
  other v2: 4473.5,3146 4509,3194.5 4507.5,3380 4506,3443 2543.5,3790.5
VDDRTC: pad.PA34 U1.N15 | length 2047.8
  Top Layer w5: v1@2694.74,2581.59 U1.N15@2710.67,2565.84 ; v1@2696.81,2579.98 U1.N15@2718.22,2573.39 ; v1@2699.06,2579.5 cw(c2699.06,2566.22) 2708.45,2575.61 cw(c2717.84,2585) v1@2704.56,2585 ; v1@2702.47,2589.32 U1.N15@2718.22,2573.39 ; v1@2704.08,2587.25 U1.N15@2710.67,2565.84 ; U1.N15@2709.53,2569.16 ccw(c2696.55,2569.16) 2705.73,2578.33 ccw(c2714.9,2587.51) U1.N15@2714.9,2574.53 ; v1(2699.06,2585) U1.N15@2714.9,2569.16 ; v1(2699.06,2585) U1.N15@2710.67,2565.84 ; v1(2699.06,2585) U1.N15@2718.22,2573.39 ; v1(2699.06,2585) U1.N15@2714.9,2569.16 ; U1.N15@2714.9,2569.16 2703.4,2588.38 U1.N15@2714.9,2569.16 ; U1.N15@2714.9,2569.16 2695.68,2580.66 U1.N15@2714.9,2569.16
  SIGNAL_1 w5: pad.PA34@3076.62,2006.15 3122.17,2022.54 ; pad.PA34@3078.6,2001.46 3122.17,2022.54 ; pad.PA34@3081.03,1997.03 3122.17,2022.54 ; pad.PA34@3083.89,1992.91 3122.17,2022.54 ; pad.PA34@3087.94,1988.32 3124,2024.38 v1(3124,2122) ; pad.PA34@3087.94,1999.44 ccw(c3087.94,2026.29) 3106.92,2007.3 ccw(c3125.91,1988.32) pad.PA34@3099.06,1988.32 ; pad.PA34@3087.94,2004.44 ccw(c3087.94,2043.36) 3115.46,2015.84 ccw(c3142.98,1988.32) pad.PA34@3104.06,1988.32 ; pad.PA34@3087.94,2009.44 ccw(c3087.94,2060.43) 3124,2024.37 ccw(c3160.05,1988.32) pad.PA34@3109.06,1988.32 ; pad.PA34@3092.53,1984.27 3122.17,2022.54 ; pad.PA34@3096.65,1981.41 3122.17,2022.54 ; pad.PA34@3101.08,1978.97 3122.17,2022.54 ; pad.PA34@3105.77,1977 3122.17,2022.54 ; v1@3118.54,2121.34 3124,2099 v1@3129.46,2121.34 ; v1@3120.11,2118.11 cw(c3110.72,2108.72) 3124,2108.72 cw(c3137.28,2108.72) v1@3127.89,2118.11
  SIGNAL_2 w5: v1@2693.6,2584.34 2699.06,2562 v1@2704.52,2584.34 ; v1@2695.17,2581.11 cw(c2685.78,2571.72) 2699.06,2571.72 cw(c2712.34,2571.72) v1@2702.95,2581.11 ; v1(2699.06,2585) 2699.06,2506.62 2672.5,2480.06 2672.5,2361.93 2862.93,2171.5 2963.44,2171.5 2984.44,2150.5 3095.5,2150.5 v1(3124,2122) 3105.39,2140.61 ; v1@3118.5,2122 ccw(c3105.22,2122) 3114.61,2131.39 ccw(c3124,2140.78) v1@3124,2127.5 ; v1@3119.73,2118.54 3105.39,2140.61 ; v1@3127.46,2126.27 3105.39,2140.61
VFRAME: pad.PB31 U1.L7 | length 1439.5
  Top Layer w5: U1.L7@2777.89,2826.5 ccw(c2777.89,2839.47) 2787.07,2830.3 ccw(c2796.24,2821.13) U1.L7@2783.27,2821.13 ; v1@2788,2836.73 cw(c2774.72,2836.73) 2784.11,2827.34 cw(c2793.5,2817.95) v1@2793.5,2831.23 ; v1@2788.47,2838.96 U1.L7@2782.13,2817.82 ; v1@2789.16,2840.11 U1.L7@2777.89,2821.13 ; v1@2790.1,2841.06 U1.L7@2774.58,2825.36 ; v1@2795.72,2831.7 U1.L7@2774.58,2825.36 ; v1@2796.87,2832.39 U1.L7@2777.89,2821.13 ; v1@2797.82,2833.33 U1.L7@2782.13,2817.82 ; U1.L7@2774.58,2825.36 v1(2793.5,2836.73) ; U1.L7@2774.58,2825.36 v1(2793.5,2836.73) ; U1.L7@2777.89,2821.13 v1(2793.5,2836.73) ; U1.L7@2777.89,2821.13 v1(2793.5,2836.73) ; U1.L7@2782.13,2817.82 v1(2793.5,2836.73) ; U1.L7@2782.13,2817.82 v1(2793.5,2836.73)
  Bottom Layer w5: pad.PB31@2098.9,3204 pad.PB31@2084,3189.1 2094.9,3189.1 2138.89,3145.11 2740.1,3145.11 2756.85,3128.37 2756.85,3040.94 2792.64,3005.14 ; 2788.02,3009.77 2792.64,3005.14 ; v1@2790.23,2841.15 2809.52,2852.02 ; v1@2793.5,2842.23 ccw(c2793.5,2857.28) 2804.14,2846.64 ; v1@2797.76,2833.26 2809.52,2852.02 ; v1@2799,2836.73 cw(c2810.51,2836.73) 2802.37,2844.87 ; 2809.52,2915.52 2809.52,2852.02 ; 2809.5,2915.53 2809.5,2988.29 2792.64,3005.14 ; 2809.52,2852.02 2794.23,2836.73 v1(2793.5,2836.73) 2809.52,2852.02
VLINE: pad.PB32 U1.M1 | length 1433.4
  Top Layer w5: pad.PB32@1993.73,3169.78 2037.76,3156.6 ; pad.PB32@1995.47,3174.6 2037.76,3156.6 ; pad.PB32@1997.71,3179.14 2037.76,3156.6 ; pad.PB32@2000.41,3183.38 2037.76,3156.6 ; pad.PB32@2005.26,3189.1 2037.76,3156.6 ; pad.PB32@2006.82,3176.7 cw(c2009.29,3157.03) 2023.31,3171.05 cw(c2037.34,3185.07) pad.PB32@2017.66,3187.54 ; pad.PB32@2007.44,3171.74 cw(c2010.91,3144.2) 2030.54,3163.83 cw(c2050.16,3183.45) pad.PB32@2022.62,3186.92 ; pad.PB32@2008.07,3166.78 cw(c2012.52,3131.37) 2037.76,3156.6 ; pad.PB32@2010.98,3193.95 2037.76,3156.6 ; pad.PB32@2015.22,3196.66 2037.76,3156.6 ; pad.PB32@2019.76,3198.89 2037.76,3156.6 ; pad.PB32@2024.58,3200.63 2037.76,3156.6 ; pad.PB32@2027.58,3186.29 ccw(c2062.99,3181.84) 2037.76,3156.6 ; U1.M1@2741.02,3010.1 ccw(c2728.05,3010.1) 2737.22,3019.28 ccw(c2746.4,3028.45) U1.M1@2746.4,3015.48 ; U1.M1@2742.23,3006.71 2727.92,3028.58 ; U1.M1@2749.79,3014.27 2727.92,3028.58 ; 2037.76,3156.6 2148.32,3156.6 2183.92,3121 2635.5,3121 U1.M1@2746.4,3010.1 2727.92,3028.58
VM: pad.PB30 U1.M4 | length 1834
  Top Layer w5: v1@2726.23,2927.53 U1.M4@2742.16,2912.31 ; v1@2728.35,2925.94 U1.M4@2749.7,2919.85 ; v1@2730.5,2925.5 cw(c2730.5,2910.99) 2740.76,2921.25 ; v1@2733.83,2935.38 U1.M4@2749.7,2919.85 ; v1@2735.49,2933.31 U1.M4@2742.16,2912.31 ; v1@2736,2931 ccw(c2748.04,2931) 2739.53,2922.48 ; U1.M4@2741.02,2915.61 ccw(c2728.05,2915.61) 2737.22,2924.79 ccw(c2746.4,2933.96) U1.M4@2746.4,2920.99 ; v1(2730.5,2931) v1@2731.01,2931 ; v1(2730.5,2931) U1.M4@2746.4,2915.61 ; v1(2730.5,2931) U1.M4@2742.16,2912.31 ; v1(2730.5,2931) U1.M4@2749.7,2919.85 ; v1(2730.5,2931) U1.M4@2746.4,2915.61 ; v1@2731.01,2931 U1.M4@2746.4,2915.61 ; v1@2731.01,2931 U1.M4@2742.16,2912.31 ; v1@2731.01,2931 U1.M4@2749.7,2919.85 ; v1@2731.01,2931 U1.M4@2746.4,2915.61 ; U1.M4@2746.4,2915.61 2734.79,2934.45 U1.M4@2746.4,2915.61 ; U1.M4@2746.4,2915.61 2727.2,2926.6 U1.M4@2746.4,2915.61
  Bottom Layer w5: pad.PB30@1993.73,3091.04 2037.76,3077.86 ; pad.PB30@1995.47,3095.86 2037.76,3077.86 ; pad.PB30@1997.71,3100.4 2037.76,3077.86 ; pad.PB30@2000.41,3104.64 2037.76,3077.86 ; pad.PB30@2005.26,3110.36 2037.76,3077.86 ; pad.PB30@2006.82,3097.96 cw(c2009.29,3078.29) 2023.31,3092.31 cw(c2037.34,3106.33) pad.PB30@2017.66,3108.8 ; pad.PB30@2007.44,3093 cw(c2010.91,3065.46) 2030.54,3085.09 cw(c2050.16,3104.71) pad.PB30@2022.62,3108.18 ; pad.PB30@2008.07,3088.04 cw(c2012.52,3052.63) 2037.76,3077.86 ; pad.PB30@2010.98,3115.22 2037.76,3077.86 ; pad.PB30@2015.22,3117.92 2037.76,3077.86 ; pad.PB30@2019.76,3120.15 2037.76,3077.86 ; pad.PB30@2024.58,3121.89 2037.76,3077.86 ; pad.PB30@2027.58,3107.55 ccw(c2062.99,3103.1) 2037.76,3077.86 ; v1@2725,2931 ccw(c2711.72,2931) 2721.11,2940.39 ccw(c2730.5,2949.78) v1@2730.5,2936.5 ; v1@2726.18,2927.6 2714,2947.5 ; v1@2733.9,2935.32 2714,2947.5 ; 2037.76,3077.86 2490.28,3077.86 2528,3040.14 2528,2988.86 2569.36,2947.5 2714,2947.5 ; 2714,2947.5 v1(2730.5,2931) 2714,2947.5
WP_SD: pad.PA19 U1.K15 | length 2158
  Top Layer w5: U1.K15@2809.39,2574.53 ccw(c2809.39,2587.51) 2818.56,2578.33 ccw(c2827.74,2569.16) U1.K15@2814.76,2569.16 ; v1@2820.01,2585.28 cw(c2806.73,2585.28) 2816.12,2575.89 cw(c2825.51,2566.5) v1@2825.51,2579.78 ; v1@2820.51,2587.56 U1.K15@2813.61,2565.83 ; v1@2821.18,2588.67 U1.K15@2809.39,2569.16 ; v1@2822.1,2589.59 U1.K15@2806.06,2573.38 ; v1@2827.8,2580.28 U1.K15@2806.06,2573.38 ; v1@2828.9,2580.95 U1.K15@2809.39,2569.16 ; v1@2829.82,2581.86 U1.K15@2813.61,2565.83 ; U1.K15@2806.06,2573.38 v1(2825.51,2585.28) ; U1.K15@2806.06,2573.38 v1(2825.51,2585.28) ; U1.K15@2809.39,2569.16 v1(2825.51,2585.28) ; U1.K15@2809.39,2569.16 v1(2825.51,2585.28) ; U1.K15@2813.61,2565.83 v1(2825.51,2585.28) ; U1.K15@2813.61,2565.83 v1(2825.51,2585.28)
  SIGNAL_2 w5: v1@2822.13,2580.94 2841.23,2569.56 ; v1@2825.51,2579.78 cw(c2825.51,2566.5) 2834.9,2575.89 cw(c2844.29,2585.28) v1@2831.01,2585.28 ; v1(2825.51,2585.28) 2841.23,2569.56 ; v1@2829.85,2588.66 2841.23,2569.56 ; v1@3624.11,2260.11 ccw(c3614.72,2250.72) 3614.72,2264 ccw(c3614.72,2277.28) v1@3624.11,2267.89 ; v1@3627.34,2258.54 3605,2264 v1@3627.34,2269.46 ; v1(3628,2264) 3440.92,2264 3427.92,2251 3049.94,2251 2884.5,2416.44 2884.5,2515.22 2861.44,2538.28 2850.59,2538.28 2841.23,2547.64 2841.23,2569.56
  Bottom Layer w5: pad.PA19@3618.8,2072.83 3639.12,2105.68 ; pad.PA19@3623.35,2070.42 3639.12,2105.68 ; pad.PA19@3624.18,2081.99 ccw(c3588.12,2118.05) 3639.12,2118.05 ccw(c3690.11,2118.05) pad.PA19@3654.05,2081.99 ; pad.PA19@3627.72,2078.46 ccw(c3600.2,2105.98) 3639.12,2105.98 ccw(c3678.04,2105.98) pad.PA19@3650.52,2078.46 ; v1(3628,2264) 3639.12,2252.88 pad.PA19@3639.12,2067.06 ; pad.PA19@3628.11,2068.66 3639.12,2105.68 ; pad.PA19@3631.25,2074.92 ccw(c3612.27,2093.91) 3639.12,2093.91 ccw(c3665.97,2093.91) pad.PA19@3646.98,2074.92 ; pad.PA19@3633.02,2067.54 3639.12,2105.68 ; pad.PA19@3645.22,2067.54 3639.12,2105.68 ; pad.PA19@3650.12,2068.66 3639.12,2105.68 ; pad.PA19@3654.88,2070.42 3639.12,2105.68 ; pad.PA19@3659.43,2072.83 3639.12,2105.68
XTIPLL: C5.1 U1.G14 X2.2 | length 986
  Top Layer w5: v1@2883.9,2588.4 U1.G14@2899.64,2603.96 ; v1@2885.99,2590.03 U1.G14@2907.19,2596.42 ; v1@2888.22,2590.5 ccw(c2888.22,2603.78) 2897.61,2594.39 ccw(c2907,2585) v1@2893.72,2585 ; v1@2891.62,2580.68 U1.G14@2907.19,2596.42 ; v1@2893.25,2582.77 U1.G14@2899.64,2603.96 ; U1.G14@2898.5,2600.65 cw(c2885.53,2600.65) 2894.7,2591.48 cw(c2903.88,2582.31) U1.G14@2903.88,2595.28 ; v1(2888.22,2585) U1.G14@2903.88,2600.65 ; v1(2888.22,2585) U1.G14@2907.19,2596.42 ; v1(2888.22,2585) U1.G14@2899.64,2603.96 ; v1(2888.22,2585) U1.G14@2903.88,2600.65 ; U1.G14@2903.88,2600.65 2884.85,2589.34 U1.G14@2903.88,2600.65 ; U1.G14@2903.88,2600.65 2892.57,2581.62 U1.G14@2903.88,2600.65
  Bottom Layer w5: 2872.72,2476.21 2872.72,2569.5 ; v1@2882.72,2585 cw(c2869.45,2585) 2878.83,2575.61 cw(c2888.22,2566.22) v1@2888.22,2579.5 ; v1@2883.88,2588.37 2872.72,2569.5 ; v1@2891.59,2580.65 2872.72,2569.5 ; 2872.72,2569.5 v1(2888.22,2585) 2872.72,2569.5
  Bottom Layer w15: X2.2@2677.64,2280.21 X2.2@2661.1,2263.68 ; C5.1@2717.04,2254.59 ccw(c2704.24,2241.78) 2704.24,2259.89 ccw(c2704.24,2277.99) C5.1@2717.04,2265.19 ; C5.1@2722.35,2259.89 X2.2@2664.89,2259.89 ; C5.1@2727.35,2259.89 X2.2@2664.89,2259.89 ; 2872.72,2476.21 2661.1,2264.59 X2.2@2661.1,2263.68 ; X2.2@2661.1,2263.68 X2.2@2664.89,2259.89
XTIRTC: C1.1 U1.M14 X1.2 | length 1124.4
  Top Layer w5: v1@2726.58,2613.72 U1.M14@2742.16,2597.35 ; v1@2728.6,2612.05 U1.M14@2749.7,2604.89 ; v1@2731,2611.5 cw(c2731,2600.51) 2738.77,2608.28 ; v1@2734.54,2621.21 U1.M14@2749.7,2604.89 ; v1@2736.08,2619.11 U1.M14@2742.16,2597.35 ; v1@2736.5,2617 ccw(c2752.07,2617) U1.M14@2741.06,2605.99 ; U1.M14@2741.02,2600.65 ccw(c2728.05,2600.65) 2737.22,2609.83 ccw(c2746.4,2619) U1.M14@2746.4,2606.03 ; v1@2731,2616.05 v1(2731,2617) ; v1@2731,2616.05 U1.M14@2746.4,2600.65 ; v1@2731,2616.05 U1.M14@2742.16,2597.35 ; v1@2731,2616.05 U1.M14@2749.7,2604.89 ; v1@2731,2616.05 U1.M14@2746.4,2600.65 ; v1(2731,2617) U1.M14@2746.4,2600.65 ; v1(2731,2617) U1.M14@2742.16,2597.35 ; v1(2731,2617) U1.M14@2749.7,2604.89 ; v1(2731,2617) U1.M14@2746.4,2600.65 ; U1.M14@2746.4,2600.65 2735.44,2620.25 U1.M14@2746.4,2600.65 ; U1.M14@2746.4,2600.65 2727.49,2612.77 U1.M14@2746.4,2600.65
  SIGNAL_1 w5: X1.2@2415.32,2641.1 2442.78,2642.58 ; X1.2@2415.52,2646.18 2442.78,2642.58 ; X1.2@2417.41,2640.92 cw(c2417.41,2575.67) 2463.55,2621.81 ; X1.2@2417.41,2645.92 cw(c2417.41,2592.75) 2455.01,2630.35 ; X1.2@2417.41,2650.92 cw(c2417.41,2609.82) 2446.48,2638.88 ; X1.2@2417.41,2653.19 2442.78,2642.58 ; X1.2@2417.41,2655.92 cw(c2417.41,2626.89) 2437.94,2647.42 ; X1.2@2417.41,2667.95 2484.86,2600.5 2714.5,2600.5 ; X1.2@2421.07,2659.46 2442.78,2642.58 ; X1.2@2424.54,2663.16 2442.78,2642.58 ; v1@2725.5,2617 cw(c2712.22,2617) 2721.61,2607.61 cw(c2731,2598.22) v1@2731,2611.5 ; v1@2726.68,2620.4 2714.5,2600.5 ; v1@2730.05,2617 v1(2731,2617) ; v1@2734.4,2612.68 2714.5,2600.5 ; 2714.5,2600.5 v1(2731,2617) ; 2714.5,2600.5 v1(2731,2617)
XTOPLL: C6.1 U1.G15 X2.1 | length 858.2
  Top Layer w5: v1@2883.9,2556.9 U1.G15@2899.64,2572.47 ; v1@2885.99,2558.53 U1.G15@2907.19,2564.93 ; v1@2888.22,2559 ccw(c2888.22,2572.28) 2897.61,2562.89 ccw(c2907,2553.5) v1@2893.72,2553.5 ; v1@2891.62,2549.18 U1.G15@2907.19,2564.93 ; v1@2893.25,2551.27 U1.G15@2899.64,2572.47 ; U1.G15@2898.5,2569.16 cw(c2885.53,2569.16) 2894.7,2559.98 cw(c2903.88,2550.81) U1.G15@2903.88,2563.78 ; v1(2888.22,2553.5) U1.G15@2903.88,2569.16 ; v1(2888.22,2553.5) U1.G15@2907.19,2564.93 ; v1(2888.22,2553.5) U1.G15@2899.64,2572.47 ; v1(2888.22,2553.5) U1.G15@2903.88,2569.16 ; U1.G15@2903.88,2569.16 2884.84,2557.84 U1.G15@2903.88,2569.16 ; U1.G15@2903.88,2569.16 2892.56,2550.12 U1.G15@2903.88,2569.16
  Top Layer w15: X2.1@2853.5,2268.28 X2.1@2858.1,2263.68
  Bottom Layer w5: v1@2884.85,2549.15 2903.72,2538 ; v1@2888.22,2548 cw(c2888.22,2534.72) 2897.61,2544.11 cw(c2907,2553.5) v1@2893.72,2553.5 ; v1@2889.5,2552.22 v1(2888.22,2553.5) 2903.72,2538 ; v1@2892.57,2556.87 2903.72,2538 ; 2903.72,2451 2903.72,2538
  Bottom Layer w15: C6.1@2791.85,2259.89 X2.1@2854.31,2259.89 ; C6.1@2796.85,2259.89 X2.1@2854.31,2259.89 ; C6.1@2802.15,2254.59 cw(c2814.95,2241.78) 2814.95,2259.89 cw(c2814.95,2277.99) C6.1@2802.15,2265.19 ; X2.1@2867.46,2263.68 X2.1@2858.1,2263.68 ; 2903.72,2451 2887,2434.28 2887,2292.58 X2.1@2858.1,2263.68 ; X2.1@2854.31,2259.89 X2.1@2858.1,2263.68
XTORTC: C2.1 U1.L12 X1.1 | length 1140.6
  Top Layer w5: U1.L12@2777.89,2658.27 cw(c2777.89,2645.3) 2787.07,2654.47 cw(c2796.24,2663.65) U1.L12@2783.27,2663.65 ; v1@2787.77,2648.27 ccw(c2774.49,2648.27) 2783.88,2657.66 ccw(c2793.27,2667.05) v1@2793.27,2653.77 ; v1@2788.23,2646.08 U1.L12@2782.13,2666.95 ; v1@2788.92,2644.91 U1.L12@2777.89,2663.65 ; v1@2789.88,2643.94 U1.L12@2774.59,2659.41 ; v1@2795.46,2653.31 U1.L12@2774.59,2659.41 ; v1@2796.63,2652.62 U1.L12@2777.89,2663.65 ; v1@2797.6,2651.66 U1.L12@2782.13,2666.95 ; U1.L12@2774.59,2659.41 v1(2793.27,2648.27) ; U1.L12@2774.59,2659.41 v1(2793.27,2648.27) ; U1.L12@2777.89,2663.65 v1(2793.27,2648.27) ; U1.L12@2777.89,2663.65 v1(2793.27,2648.27) ; U1.L12@2782.13,2666.95 v1(2793.27,2648.27) ; U1.L12@2782.13,2666.95 v1(2793.27,2648.27)
  Top Layer w15: U1.L12@2775.21,2663.65 U1.L12@2777.89,2663.65
  SIGNAL_1 w5: X1.1@2494.06,2641.1 2521.52,2642.58 ; X1.1@2494.26,2646.18 2521.52,2642.58 ; X1.1@2495.97,2655.92 cw(c2497.62,2630.6) 2515.56,2648.54 ; X1.1@2496.15,2653.19 2521.52,2642.58 ; X1.1@2496.15,2667.95 2531.6,2632.5 2737.55,2632.5 2737.8,2632.25 2777.25,2632.25 ; X1.1@2496.3,2650.93 cw(c2498.58,2615.94) 2523.37,2640.73 ; X1.1@2496.62,2645.94 cw(c2499.53,2601.28) 2531.17,2632.93 ; X1.1@2499.81,2659.46 2521.52,2642.58 ; X1.1@2503.28,2663.16 2521.52,2642.58 ; v1@2787.77,2648.27 cw(c2774.49,2648.27) 2783.88,2638.88 cw(c2793.27,2629.49) v1@2793.27,2642.77 ; v1@2788.94,2651.66 2777.25,2632.25 ; v1@2796.66,2643.94 2777.25,2632.25 ; 2777.25,2632.25 v1(2793.27,2648.27) 2777.25,2632.25
  Bottom Layer w30: C2.1@2495.89,2607.65 C2.1@2496.15,2607.92 ; C2.1@2496.15,2607.92 X1.1@2496.15,2667.95 2495.89,2612.65 2496.15,2653.19 C2.1@2496.15,2607.92
pads on no net: U1.D11 U1.E3 U1.N13 U2.1 U2.2 U2.3 U2.4 U2.5 U2.6 U2.10 U2.11 U2.14 U2.15 U2.20 U2.21 U2.22 U2.23 U2.24 U2.25 U2.26 U2.27 U2.28 U2.33 U2.34 U2.35 U2.38 U2.39 U2.40 U2.45 U2.46 U2.47 U2.48 U6.40 U7.40 U10.15

## Polygon pours and split planes (outlines as drawn)
GND on Bottom Layer (hatched 90Degree grid 0 track 8, remove dead copper): 3075.03,2176 3023.61,2132 2563.16,2132 2520.5,2168.5 2520.5,2286 2520.5,2349 2574.26,2395 2598.8,2395 3042.89,2395 3106,2341 3106,2203 3106,2202.5 3075.03,2176
VDD33V on POWER (split plane): 1825.02,4068.93 4603.04,4068.93 4603.22,4068.94 4605.11,4068.7 4607.03,4067.9 4608.68,4066.63 4609.94,4064.98 4610.74,4063.06 4610.99,4061.18 4610.97,4061 4610.97,1727 4610.99,1726.82 4610.74,1724.93 4609.94,1723.01 4608.67,1721.35 4607.02,1720.08 4605.09,1719.28 4603.2,1719.03 4603.02,1719.05 1875.09,1719.05 1872.02,1720.32 1872.02,1719.07 1872,1719.07 1825.02,1719.07 1824.84,1719.06 1822.95,1719.3 1821.03,1720.1 1819.37,1721.37 1818.1,1723.03 1817.3,1724.95 1817.06,1726.84 1817.07,1727.02 1817.07,4060.98 1817.06,4061.16 1817.3,4063.05 1818.1,4064.97 1819.37,4066.63 1821.03,4067.9 1822.95,4068.7 1824.84,4068.94
VDD1.25V on POWER (split plane): 2269.4,3709.5 2269.79,3707.55 2270.9,3705.9 2430.73,3546.06 2761.9,3214.9 2761.9,3214.89 2793.4,3183.4 2795.05,3182.29 2797,3181.9 3299.39,3181.9 3389.9,3091.39 3389.9,2672.11 3281.4,2563.6 3280.29,2561.95 3279.9,2560 3279.9,2213.1 2616.61,2213.1 2525.1,2304.61 2525.1,2499.9 2668,2499.9 2669.95,2500.29 2671.6,2501.4 2672.71,2503.05 2673.1,2505 2673.1,2552.83 2687.6,2567.34 2688.71,2568.99 2689.1,2570.94 2689.1,2652.9 2860,2652.9 2861.95,2653.29 2863.6,2654.4 2864.71,2656.05 2865.1,2658 2865.1,2710 2864.71,2711.95 2863.6,2713.6 2861.95,2714.71 2860.08,2715.08 2859.71,2716.95 2858.6,2718.6 2856.95,2719.71 2855,2720.1 2600.56,2720.1 2598.61,2719.71 2596.96,2718.6 2594.36,2716.01 2574.36,2696.01 2573.25,2694.35 2572.86,2692.4 2572.86,2690.61 2572.62,2685.07 2571.66,2677.79 2570.07,2670.62 2567.86,2663.62 2565.06,2656.83 2561.66,2650.32 2557.72,2644.13 2553.25,2638.3 2548.51,2633.13 2548.24,2632.94 2532.89,2617.6 2430,2617.6 2429.7,2617.54 2424.4,2617.84 2418.88,2618.77 2413.49,2620.33 2408.32,2622.47 2403.41,2625.18 2398.84,2628.43 2394.66,2632.16 2390.93,2636.34 2387.68,2640.91 2384.97,2645.82 2382.83,2650.99 2381.27,2656.38 2380.34,2661.9 2380.04,2667.2 2380.1,2667.5 2380.1,2905 2380.04,2905.27 2380.33,2908.91 2381.25,2912.72 2382.75,2916.34 2384.79,2919.68 2387.34,2922.66 2390.32,2925.21 2393.66,2927.25 2397.28,2928.75 2401.09,2929.67 2404.73,2929.96 2405,2929.9 2406.95,2930.29 2408.6,2931.4 2409.71,2933.05 2410.1,2935 2410.1,3031 2409.71,3032.95 2408.6,3034.6 2050.1,3393.11 2050.1,3815 2050.1,3839.4 2269.4,3839.4
VDD33V on POWER (split plane): 1800.1,4089.69 1800.1,4089.9 1800.34,4089.9
GND on GND (split plane): 1824.98,4078.9 4603,4078.9 4603.28,4078.96 4606.5,4078.64 4609.87,4077.62 4612.98,4075.96 4615.7,4073.72 4617.94,4071 4619.6,4067.9 4619.9,4066.89 4619.9,1920 4619.9,1721.11 4619.6,1720.1 4617.94,1717 4615.7,1714.28 4612.98,1712.04 4609.87,1710.38 4608.94,1710.1 1819.04,1710.1 1818.1,1710.38 1814.99,1712.04 1812.26,1714.28 1810.02,1717.01 1808.36,1720.12 1807.34,1723.49 1807.02,1726.72 1807.08,1727 1807.08,1727.02 1807.08,4061 1807.02,4061.28 1807.34,4064.51 1808.36,4067.88 1810.02,4070.99 1812.26,4073.72 1814.99,4075.96 1818.1,4077.62 1821.47,4078.64 1824.69,4078.96
GND on GND (split plane): 4619.9,4083.38 4619.5,4083.73 4615.74,4086.03 4611.67,4087.71 4607.39,4088.74 4603.1,4089.08 4603,4089.1 1824.98,4089.1 1824.88,4089.08 1820.58,4088.74 1816.3,4087.71 1812.23,4086.03 1808.47,4083.72 1805.12,4080.86 1802.26,4077.51 1800.1,4073.99 1800.1,4089.9 4619.9,4089.9
GND on GND (split plane): 1802.26,1710.49 1802.59,1710.1 1800.1,1710.1 1800.1,1714.01

## Keep-outs
Keep-Out Layer:
  lines w2: 1801.98,1727.02 ccw(c1825,1727.02) 1825,1704 2142,1704 2706,1704 4603.02,1704 ccw(c4603,1727) 4626.02,1727 4626,1794 4626,1900 4626,3042 4626,4061.02 ccw(c4603,4061) 4603,4084.02 4442,4084 2348,4084 2048,4084 1894,4084 1825,4084 ccw(c1825,4060.98) 1801.98,4060.98 1802,1727.02

## Other copper
Top Layer:
  rectangle net GND: 4536.5,1720 4602.5,4063
  rectangle net GND: 1820,1720 4600,1820
  rectangle net GND: 1820,3962.5 4579.5,4063
  region net GND: 1920,1720 1920,4063.5 1820,4063.5 1820,1720
  rectangle net VDD33V: 2274.98,3747.5 2410,3807.5
  rectangle net VDD33V: 2282.5,3665 2336,3757.5
  rectangle net GND: 2210,3631.5 2265,3798.5
SIGNAL_1:
  rectangle net VDD5V: 4324.5,2043 4433.5,2150
  rectangle net VDD5V: 4312,3794.5 4434.5,3881.5
  rectangle net GND: 4536.5,1720 4602.5,4063
  rectangle net GND: 1820,4016 4602,4064
  rectangle net GND: 1820,1820 1890,4060
  rectangle net GND: 1820,1720 4600,1820
SIGNAL_2:
  rectangle net GND: 4536.5,1720 4602.5,4063
  rectangle net GND: 1820,1720 4600,1820
  rectangle net GND: 1820,1820 1900,4060
  rectangle net GND: 1820,3979.5 4570,4064
Bottom Layer:
  rectangle net GND: 4536.5,1720 4602.5,4064
  rectangle net VDD33V: 2275.3,3671 2336,3807.5
  rectangle net VDD33V: 4242.5,3115 4396,3441.5
  rectangle net VDD33V: 4380.5,3115 4525.5,3500.5
  rectangle net VDD33V: 4343,3300 4402.5,3577
  rectangle net GND: 1820,1720 1876.5,4064
  rectangle net GND: 1820,3989.5 4569,4064
  rectangle net GND: 1820,1720 4600,1820
  rectangle net XTIRTC: 2412.5,2639.5 2438,2747
  rectangle net XTIRTC: 2396.5,2639.5 2436.5,2704
  rectangle net GND: 2370,3555 2475,3612.5
  rectangle net GND: 2332.5,3480 2405.34,3625.42
  rectangle net VDD33V: 2275.3,3747.5 2559.47,3807.5
  rectangle net VDD1.25V: 2120,3728.84 2187.5,3842.5
  rectangle net VDD1.25V: 2155,3726.1 2199.42,3792.5
  rectangle net VDD1.25V: 2152.5,3480 2297.5,3632.5
  rectangle net VDD5V: 4431.5,3518.5 4524,3883
  rectangle net VDD5V: 4311.5,3800.5 4494.5,3883
  rectangle net GND: 4231.5,3458 4321.5,3781
  rectangle net GND: 4231,3597.5 4399,3775.5
  rectangle net VDD33V: 2914.81,2597.69 2925,2603
  rectangle net VDD33V: 3261.5,2489 3322,2572
  rectangle net VDD33V: 2838.7,2631.5 2843.5,2644.5
POWER (plane layer: these items are gaps in the copper):
  lines w10: 2520,2415 2520,2505 ; 2577.96,2679.41 2577.96,2692.4 ; 2640,2715 2685,2715 ; 2652,2715 2600.56,2715 2597.96,2712.4 2577.96,2692.4 ; 2665,2715 2855,2715 ; 2763.39,3220.61 2797,3187 3301.5,3187 3395,3093.5 3395,2670 3285,2560 3285,2208 2614.5,2208 2520,2302.5 2520,2505 ; 2765.5,3218.5 2434.33,3549.67 2274.5,3709.5 2274.5,3844.5 2045,3844.5 2045,3815 2045,3391 2405,3031 2405,2935 ccw(c2405,2905) 2375,2905 2375,2667.5 ccw(c2430,2667.5) 2430,2612.5 2535,2612.5 2551.84,2629.34 ccw(c2488.78,2692.4) 2577.96,2692.4 ; 2860,2710 2860,2658 2684,2658 2684,2570.94 2668,2554.94 2668,2505 2520,2505
  lines w30: 1872,1704 ccw(c1872.02,1704) 1872.02,1703.98 ; 1872.02,1703.98 4603.02,1703.98 ccw(c4603.02,1727) 4626.04,1727 4626.04,4061 ccw(c4603.04,4061) 4603.04,4084 1825.02,4084 ccw(c1825.02,4060.98) 1802,4060.98 1802,1727.02 ccw(c1825.02,1727.02) 1825.02,1704 1872,1704
GND (plane layer: these items are gaps in the copper):
  lines w10: 1801.98,1727 ccw(c1824.98,1727) 1824.98,1704 4603,1704 ccw(c4603,1726.98) 4625.98,1726.98 4625.98,4061.02 ccw(c4603,4061.02) 4603,4084 1824.98,4084 ccw(c1824.98,4061) 1801.98,4061 1801.98,1727.02 ; 1801.98,1727 1801.98,1727.02